# Altium PCB POWER.PcbDoc
Units mm, origin at the board's own origin, x right, y up, seen from the top; angles counter-clockwise.
Board outline 80.67 x 18.44 mm, 2 copper layers (Top Layer, Bottom Layer); 26 components, 15 nets, 57 pads, 6 vias.
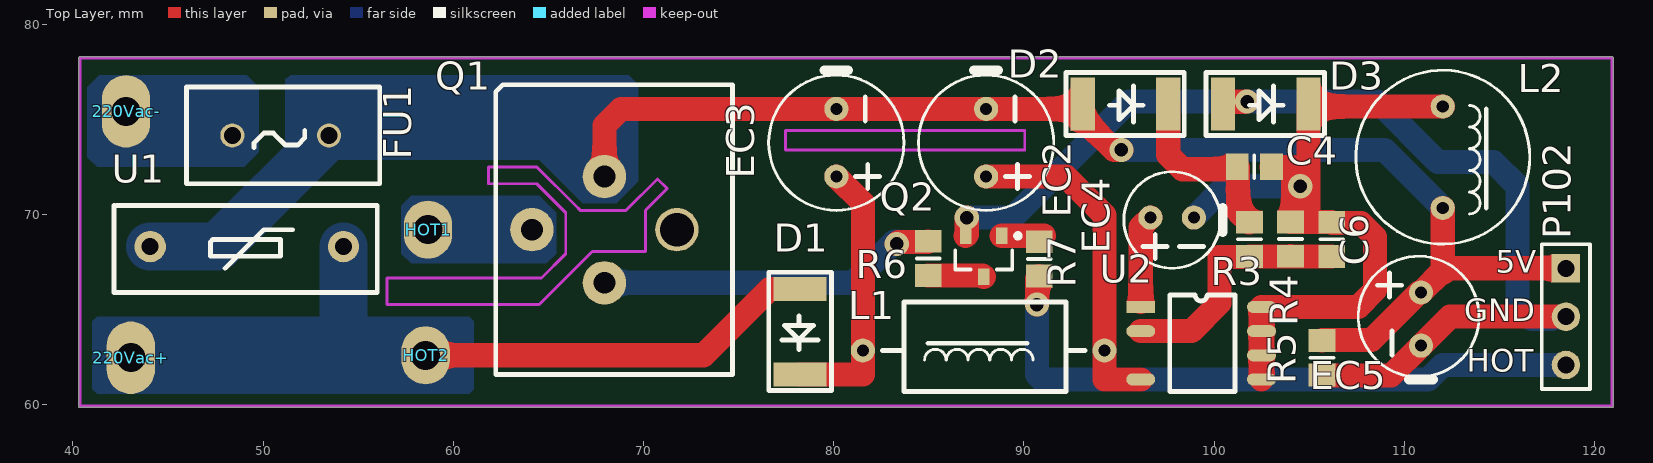
[diagram p0: Top Layer view]
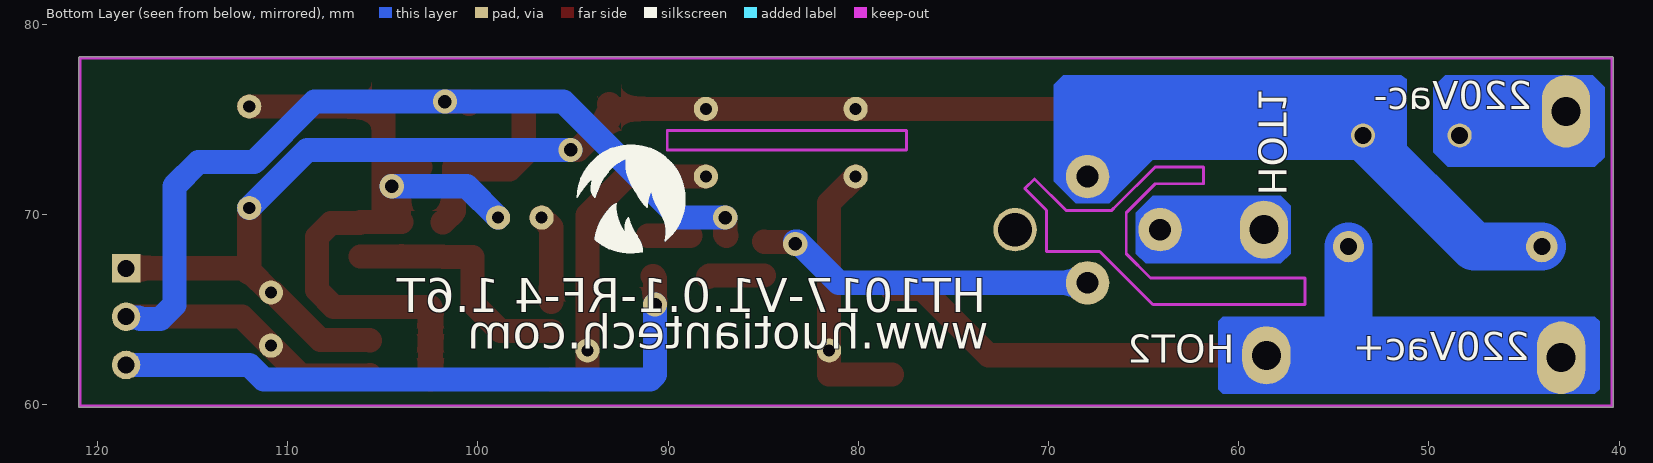
[diagram p1: Bottom Layer view, seen from below]

## Layer stack, top to bottom
Top Solder: solder mask 0.0102, Solder Resist, Dk 3.5
Top Layer: signal copper 0.0356
Dielectric 1: dielectric 0.32, FR-4, Dk 4.8
Bottom Layer: signal copper 0.0356
Bottom Solder: solder mask 0.0102, Solder Resist, Dk 3.5

## Board outline
40.386,59.867 cw(c40.386,59.944) 40.309,59.944 40.309,78.232 cw(c40.386,78.232) 40.386,78.309 120.904,78.309 cw(c120.904,78.232) 120.981,78.232 120.981,59.944 cw(c120.904,59.944) 120.904,59.867

## Design rules (kind name [scope] priority, off if disabled: settings)
Clearance [All] p1: gap=0.254 ignorepadtopadclearanceinfootprint=FALSE
PolygonConnect [All] p1: connectstyle=Relief reliefconductorwidth=0.254 reliefentries=4 polygonreliefangle="90 Angle" airgapwidth=0.254
RoutingVias [All] p1: holewidth=0.711 width=1.27 viastyle="Through Hole" minholewidth=0.711 minwidth=1.27 maxholewidth=1.27 maxwidth=2.54
SolderMaskExpansion [All] p1: expansion=0.102
Width [All] p1: maxlimit=2.54 minlimit=0.254 preferedwidth=0.762
30 further rules are at their usual default settings.

## Components (designator, comment, footprint, x,y, rotation, side; value= is the part's Value field where it differs from the comment)
220Vac+ "焊接点" HanJie#1 43.053,62.484 r90 top
220Vac- "焊接点" HanJie#1 42.799,75.438 r90 top
C4 "电容" 6-0805_N 102.108,72.517 r180 top value=105
C6 "电容" 6-0805_N 106.172,68.707 r270 top value=102
D1 "M7" ErJiGuan-M7 78.232,66.091 r270 top
D2 "M7" ErJiGuan-M7 93.091,75.819 r0 top
D3 "ES1J" ErJiGuan-M7 100.457,75.819 r0 top
EC2 "电容" DianRong-3.5mm 88.011,75.565 r270 top value=4.7uF/400V
EC3 "电容" DianRong-3.5mm 80.137,75.565 r270 top value=4.7uF/400V
EC4 "电容" DianRong-3.3mm 98.933,69.85 r180 top value=4.7uF/50V
EC5 "电容" DianRong-3.2mm 110.871,63.119 r90 top value=220uF/16V
FU1 "T3.15A 250Vac" BaoXianSi 48.387,74.168 r0 top
HOT1 "焊接点" HanJie#2 58.674,69.215 r90 top
HOT2 "焊接点" HanJie#2 58.547,62.611 r90 top
L1 "电感" DianGan-12.5mm 81.534,62.865 r0 top value=1mH
L2 "电感" DianGan 112.014,75.692 r270 top value=1mH
P102 "Header 3" HDR1X3 118.491,67.183 r270 top
Q1 "BTA16-600B" BTA16-600B 71.755,69.215 r90 top
Q2 "S8050" SOT-23_L 87.884,67.818 r270 top
R3 "电阻" 6-0805_N 101.854,68.707 r90 top value=2.7K
R4 "电阻" 6-0805_N 104.013,68.718 r270 top value=2.4K
R5 "电阻" 6-0805_N 105.664,62.484 r90 top value=1K
R6 "电阻" 6-0805_N 84.963,67.702 r270 top value=330R
R7 "电阻" 6-0805_N 90.805,67.68 r270 top value=1K
U1 "10471K" YaMinDianZhu 54.229,68.326 r180 top
U2 "PN8015M" SOP7-PN8015M 96.139,65.151 r0 top

## Footprints (in the part's own frame and the unit in brackets; to place one, negate y for a bottom-side part, rotate by r counter-clockwise, add the part's x,y. Pads: shape width x height; smd on the part's side, far side on the other; paste and mask are expansions set on the pad)
6-0805_N [mm] "Chip Resistor, Body 2.0x1.2mm, IPC Medium Density"
  rect 1.2x1.4 smd: 1(-0.9,0) 2(0.9,0)
  silkscreen extent 0,-0.6 0,0.6, body extent -1.07,-0.7 1.07,0.7, height 0.7
BaoXianSi [mil]
  round 50 hole 35: 1(0,0) 2(200,0)
  silkscreen extent -95,-100 305,100
BTA16-600B [mil]
  round 90 hole 45: 1(110,150) 2(0,300) 3(-110,150)
  round 90 hole 70: ""(0,0)
  silkscreen extent -300,-115 300,375
DianGan [mil]
  round 50 hole 25: 1(0,0) 2(210,0)
  silkscreen extent -75,-180 285,180
DianGan-12.5mm [mm]
  round 1.27 hole 0.635: 1(0,0) 2(12.7,0)
  silkscreen extent 1.02,-2.16 11.68,2.54
DianRong-3.2mm [mil]
  round 50 hole 25: 1(110,0) 2(0,0)
  silkscreen extent -70,-120 185,130
DianRong-3.3mm [mil]
  round 50 hole 25: 1(90,0) 2(0,0)
  silkscreen extent -60,-95 145,105
DianRong-3.5mm [mil]
  round 50 hole 25: 1(140,0) 2(0,0)
  silkscreen extent -80,-140 210,140
ErJiGuan-M7 [mil]
  rect 50x110 smd: 1(0,0) 2(177,0)
  silkscreen extent -35,-65 210,65
HanJie#1 [mil]
  oval 150x100 hole 60: 1(0,0)
HanJie#2 [mil]
  oval 120x100 hole 60: 1(0,0)
HDR1X3 [mm] "Connector; Header; 3 Position"
  rect 1.5x1.5 hole 0.9: 1(0,0)
  round 1.5 hole 0.9: 2(2.54,0) 3(5.08,0)
  silkscreen extent -1.27,-1.27 6.35,1.27
SOP7-PN8015M [mil]
  rect 60x25 smd: 1(0,0)
  oval 60x25 smd: 2(0,-50) 3(0,-150) 4(250,-150) 5(250,-100) 6(250,-50) 7(250,0)
  silkscreen extent 60,-175 195,25
SOT-23_L [mm] "SOT23, 3-Leads, Body 2.9x1.3mm, Pitch 0.95mm, Lead Span 2.5mm, IPC High Density"
  rect 0.85x0.6 smd: 1(-1.075,0.95) 2(-1.075,-0.95) 3(1.075,0)
  silkscreen extent -1.2,-1.5 0.7,1.93, body extent -0.7,-1.5 0.7,1.5, height 1.1
YaMinDianZhu [mil]
  round 65 hole 35: 1(0,0) 2(400,0)
  silkscreen extent -70,-85 475,95

## Part data
220Vac+ 220Vac- HOT1 HOT2: library part PORT
C4 C6: library part Cap, "Capacitor", LatestRevisionDate=17-Jul-2002, LatestRevisionNote="Re-released for DXP Platform.", PackageDescription="Radial Cap, Thru-Hole; 2 Leads; 0.3 in Pin Spacing", PackageReference=RAD-0.3, Published=8-Jun-2000, Publisher="Altium Limited"
D1: library part "Diode 1N4001", "1 Amp General Purpose Rectifier", Code_JEDEC=DO-204-AL, ComponentLink1Description="Manufacturer Link", ComponentLink1URL=http://www.fairchildsemi.com/, ComponentLink2Description=Datasheet, ComponentLink2URL=http://www.fairchildsemi.com/ds/1N%2F1N4001.pdf, DatasheetVersion=1998, LatestRevisionDate=17-Jul-2002, LatestRevisionNote="Re-released for DXP Platform.", PackageDescription="Diode, Axial; Body 5.2 x 2.7 mm (LxDia. max), Lead Dia. 0.86 mm (max)", PackageReference=DO-41, PackageVersion=Aug-1999, Published=8-Jun-2000, Publisher="Altium Limited"
D2: library part "Diode 1N4007", "1 Amp General Purpose Rectifier", Code_JEDEC=DO-204-AL, ComponentLink1Description="Manufacturer Link", ComponentLink1URL=http://www.fairchildsemi.com/, ComponentLink2Description=Datasheet, ComponentLink2URL=http://www.fairchildsemi.com/ds/1N%2F1N4001.pdf, DatasheetVersion=1998, LatestRevisionDate=17-Jul-2002, LatestRevisionNote="Re-released for DXP Platform.", PackageDescription="Diode, Axial; Body 5.2 x 2.7 mm (LxDia. max), Lead Dia. 0.86 mm (max)", PackageReference=DO-41, PackageVersion=Aug-1999, Published=8-Jun-2000, Publisher="Altium Limited"
D3: library part Diode, "Default Diode", Code_JEDEC=DO-214-AB, LatestRevisionDate=17-Jul-2002, LatestRevisionNote="Re-released for DXP Platform.", PackageDescription="DO-214-AB/SMC; 2 C-Bend Leads; Body 7.9 x 5.9 mm, inc. leads (LxW)", PackageReference=SMC, PackageVersion=Sep-1996, Published=8-Jun-2000, Publisher="Altium Limited"
EC2 EC3 EC4 EC5: library part "Cap Pol1", "Polarized Capacitor (Radial)", LatestRevisionDate=17-Jul-2002, LatestRevisionNote="Re-released for DXP Platform.", PackageDescription="Polarized Capacitor (Radial); 2 Leads", PackageReference=RB7.6-15, Published=8-Jun-2000, Publisher="Altium Limited"
FU1: library part "Fuse 2", "Fuse", LatestRevisionDate=17-Jul-2002, LatestRevisionNote="Re-released for DXP Platform.", PackageDescription="Thru-Hole; 2 Leads", PackageReference=PIN-W2/E2.8, Published=8-Jun-2000, Publisher="Altium Limited"
L1 L2: library part Inductor, "Inductor", Code_IEC=1005, Code_JEITA=0402, LatestRevisionDate=29-May-2009, LatestRevisionNote="IPC-7351 Footprint Added.", PackageDescription="Chip Inductor", PackageReference=0402-A, Published=8-Jun-2000, Publisher="Altium Limited"
P102: "Header, 3-Pin", LatestRevisionDate=17-Jul-2002, LatestRevisionNote="Re-released for DXP Platform.", Publisher="Altium Limited"
Q1: library part Triac, "Silicon Bidirectional Triode Thyristor", ComponentLink1Description="Manufacturer Link", ComponentLink1URL=http://www.motorola.com/, DatasheetVersion=1999, LatestRevisionDate=17-Jul-2002, LatestRevisionNote="Re-released for DXP Platform.", Note="Pin 2 is electrically connected to Pin 4 (TAB)", PackageDescription="TO, Thru-Hole, Vertical, Heatsink Mounted; 3 In-Line Leads; Pitch 2.28 mm", PackageReference=369-03, Published=29-Sep-2000, Publisher="Altium Limited"
Q2: library part QNPN, "NPN Bipolar Transistor", LatestRevisionDate=29-May-2009, LatestRevisionNote="IPC-7351 Footprint Added.", PackageDescription="3-Pin SOT-23 Package 0.95 mm Pitch, 2.4 mm Lead Span", PackageReference=SOT-23B, PackageVersion=Aug-1999, Published=8-Jun-2000, Publisher="Altium Limited"
R3 R4 R5 R6 R7: library part Res2, "Resistor", LatestRevisionDate=17-Jul-2002, LatestRevisionNote="Re-released for DXP Platform.", PackageDescription="Axial Device, Thru-Hole; 2 Leads; 0.4 in Pin Spacing", PackageReference=AXIAL-0.4, Published=8-Jun-2000, Publisher="Altium Limited"
U1: library part "Res Varistor", "Varistor (Voltage-Sensitive Resistor)", Code_IPC=RESC2012, LatestRevisionDate=29-May-2009, LatestRevisionNote="IPC-7351 Footprint Added.", PackageDescription="Chip Resistor 0805 Case Size", PackageReference=6-0805, PackageVersion=Mar-2003, Published=24-Mar-1999, Publisher="Altium Limited"
U2: library part PN8015

## Via types
v1: diameter 1.27, hole 0.711, Top Layer to Bottom Layer, 6 vias

## Nets (pads, with @x,y where several pads share a name; then routed paths per layer and width w, separated by ;. In a path a pad name is that pad's centre, name@x,y a point inside that pad or via, vN(x,y) a via of type N, cw(c..) or ccw(c..) an arc to the next point about the centre after c; other vN are vias at no path point)
5V/0.2A: D2.1 EC2.2 EC3.2 EC5.1 FU1.2 L2.2 P102.1 Q1.1 R5.2 U1.2 | length 95.4
  Top Layer w1.27: Q1.1 67.945,74.694 68.816,75.565 EC3.2 EC2.2 92.837,75.565 D2.1 ; D2.1@93.091,75.057 94.742,73.406 v1(95.123,73.406) ; R5.2 105.699,63.419 108.269,63.419 110.763,65.913 EC5.1 112.014,67.056 L2.2 ; 112.014,66.929 112.268,67.183 P102.1
  Bottom Layer w1.27: v1(95.123,73.406) 108.966,73.406 L2.2
  Bottom Layer w2.54: U1.2 47.625,68.326 FU1.2 67.945,74.168 Q1.1
220V-N: 220Vac+.1 D1.1 HOT2.1 U1.1 | length 46.5
  Top Layer w1.27: HOT2.1 73.152,62.611 76.632,66.091 D1.1
  Bottom Layer w2.54: 220Vac+.1 58.42,62.484 HOT2.1 54.61,62.611 54.229,62.992 U1.1
GND: D3.1 EC5.2 P102.2 Q2.2 R5.1 | length 59
  Top Layer w1.27: Q2.2 86.995,68.954 v1(86.995,69.85) ; D3.1 100.457,75.946 v1(101.727,75.946) ; R5.1 105.699,61.549 109.301,61.549 EC5.2 112.395,64.643 P102.2
  Bottom Layer w1.27: v1(86.995,69.85) 89.412,69.85 95.508,75.946 v1(101.727,75.946) 108.581,75.946 111.756,72.771 114.681,72.771 115.951,71.501 115.951,65.26 116.695,64.516 117.747,64.516 117.83,64.599 118.447,64.599 P102.2
HOT: P102.3 R7.2 | length 33.5
  Top Layer w1.27: v1(90.678,65.278) 90.678,66.653 90.74,66.715 90.74,66.745 90.775,66.78 R7.2
  Bottom Layer w1.27: v1(90.678,65.278) 90.678,61.595 90.932,61.341 111.248,61.341 112.01,62.103 P102.3
Net220Vac-_1: 220Vac-.1 FU1.1 | length 6.1
  Bottom Layer w2.54: 220Vac-.1 47.117,75.438 FU1.1
NetC4_1: C4.1 C6.1 D3.2 EC4.2 L2.1 R4.1 U2.4 U2.5 U2.6 U2.7 | length 41.3
  Top Layer w1.27: U2.4 U2.5 U2.6 U2.7 107.569,65.151 108.458,66.04 108.458,68.828 107.714,69.572 106.207,69.572 C6.1 106.167,69.612 104.775,69.612 ; C4.1 104.158,72.517 104.158,69.763 104.078,69.683 104.078,69.653 104.043,69.618 R4.1 104.018,69.612 104.775,69.612 ; L2.1 104.953,75.692 104.953,69.79 104.775,69.612
  Bottom Layer w1.27: EC4.2 100.584,71.501 v1(104.521,71.501)
NetC4_2: C4.2 D2.2 R3.2 | length 9.9
  Top Layer w1.27: D2.2 97.587,73.134 98.331,72.39 101.081,72.39 101.143,72.452 101.173,72.452 101.208,72.487 C4.2 101.243,72.482 101.243,70.188 101.824,69.607 R3.2
NetC6_2: C6.2 R3.1 R4.2 U2.2 | length 15.2
  Top Layer w1.27: U2.2 98.806,63.881 100.284,65.359 100.284,67.772 101.819,67.772 R3.1 ; R4.2 104.008,67.813 101.859,67.813 R3.1 ; C6.2 R3.1
NetD1_2: D1.2 EC3.1 L1.1 | length 14.3
  Top Layer w1.27: D1.2 81.534,61.595 L1.1 81.534,70.612 EC3.1
NetEC2_1: EC2.1 L1.2 U2.3 | length 17.6
  Top Layer w1.27: EC2.1 92.202,72.009 94.234,69.977 L1.2 94.234,61.341 U2.3
NetEC4_1: EC4.1 U2.1 | length 4.7
  Top Layer w1.27: U2.1@96.139,65.405 96.139,69.342 EC4.1
NetHOT1_1: HOT1.1 Q1.2 | length 5.5
  Bottom Layer w2.54: HOT1.1 Q1.2
NetQ1_3: Q1.3 R6.1 | length 18
  Top Layer w1.27: v1(83.312,68.464) 83.415,68.567 84.928,68.567 R6.1
  Bottom Layer w1.27: Q1.3 81.026,66.421 83.185,68.58 v1@83.312,68.58
NetQ2_1: Q2.1 R7.1 | length 2.2
  Top Layer w1.27: Q2.1 R7.1@91.059,68.893
NetQ2_3: Q2.3 R6.2 | length 2.9
  Top Layer w1.27: R6.2 87.825,66.802 Q2.3
pads on no net: Q1.

## Keep-outs
Keep-Out Layer:
  lines w0.152: 40.386,59.944 120.904,59.944 120.904,78.232 40.386,78.232 40.386,59.944 ; 56.515,65.278 56.515,66.675 64.643,66.675 65.913,67.945 65.913,70.104 64.389,71.628 61.849,71.628 61.849,72.517 64.389,72.517 66.421,70.485 66.675,70.231 69.088,70.231 70.739,71.882 71.247,71.374 70.104,70.231 70.104,68.072 67.31,68.072 64.516,65.278 56.515,65.278 ; 77.47,73.406 77.47,74.422 90.043,74.422 90.043,73.406 77.47,73.406

## Other copper
Bottom Layer:
  region net NetHOT1_1: 57.277,70.485 57.785,70.993 64.516,70.993 65.405,70.104 65.405,67.945 64.897,67.437 57.785,67.437 57.277,67.945
  region net 220V-N: 41.275,60.579 41.021,60.833 41.021,64.389 41.275,64.643 60.833,64.643 61.087,64.389 61.087,60.833 60.833,60.579
  region net 5V/0.2A: 51.46,77.343 69.215,77.343 69.723,76.835 69.723,71.755 68.58,70.612 66.802,70.612 64.516,72.898 51.943,72.898 51.181,73.66 51.181,77.11
  region net Net220Vac-_1: 49.149,77.343 49.784,76.708 49.784,73.279 49.022,72.517 41.275,72.517 40.767,73.025 40.767,76.708 41.402,77.343

## Silkscreen, mask and mechanical layers (free items; w line width, h text height)
Top Overlay:
  text "5V" at 114.808,66.548 h2.03
  text "GND" at 113.157,64.008 h2.03
  text "HOT" at 113.284,61.341 h2.03
Bottom Overlay:
  drawing of 486 lines, arcs and shapes, not listed
  text "HT1017-V1.0.1-RF-4 1.6T" at 73.279,64.262 h3.05
  text "www.huotiantech.com" at 73.152,62.357 h3.05